# Altium PCB inv3ph.PcbDoc
Units mm, origin at the board's own origin, x right, y up, seen from the top; angles counter-clockwise.
Board outline 168.8 x 128.6 mm, 2 copper layers (Top Layer, Bottom Layer); 93 components, 52 nets, 234 pads, 0 vias.
Unrouted connection lines stored in the file: 3.
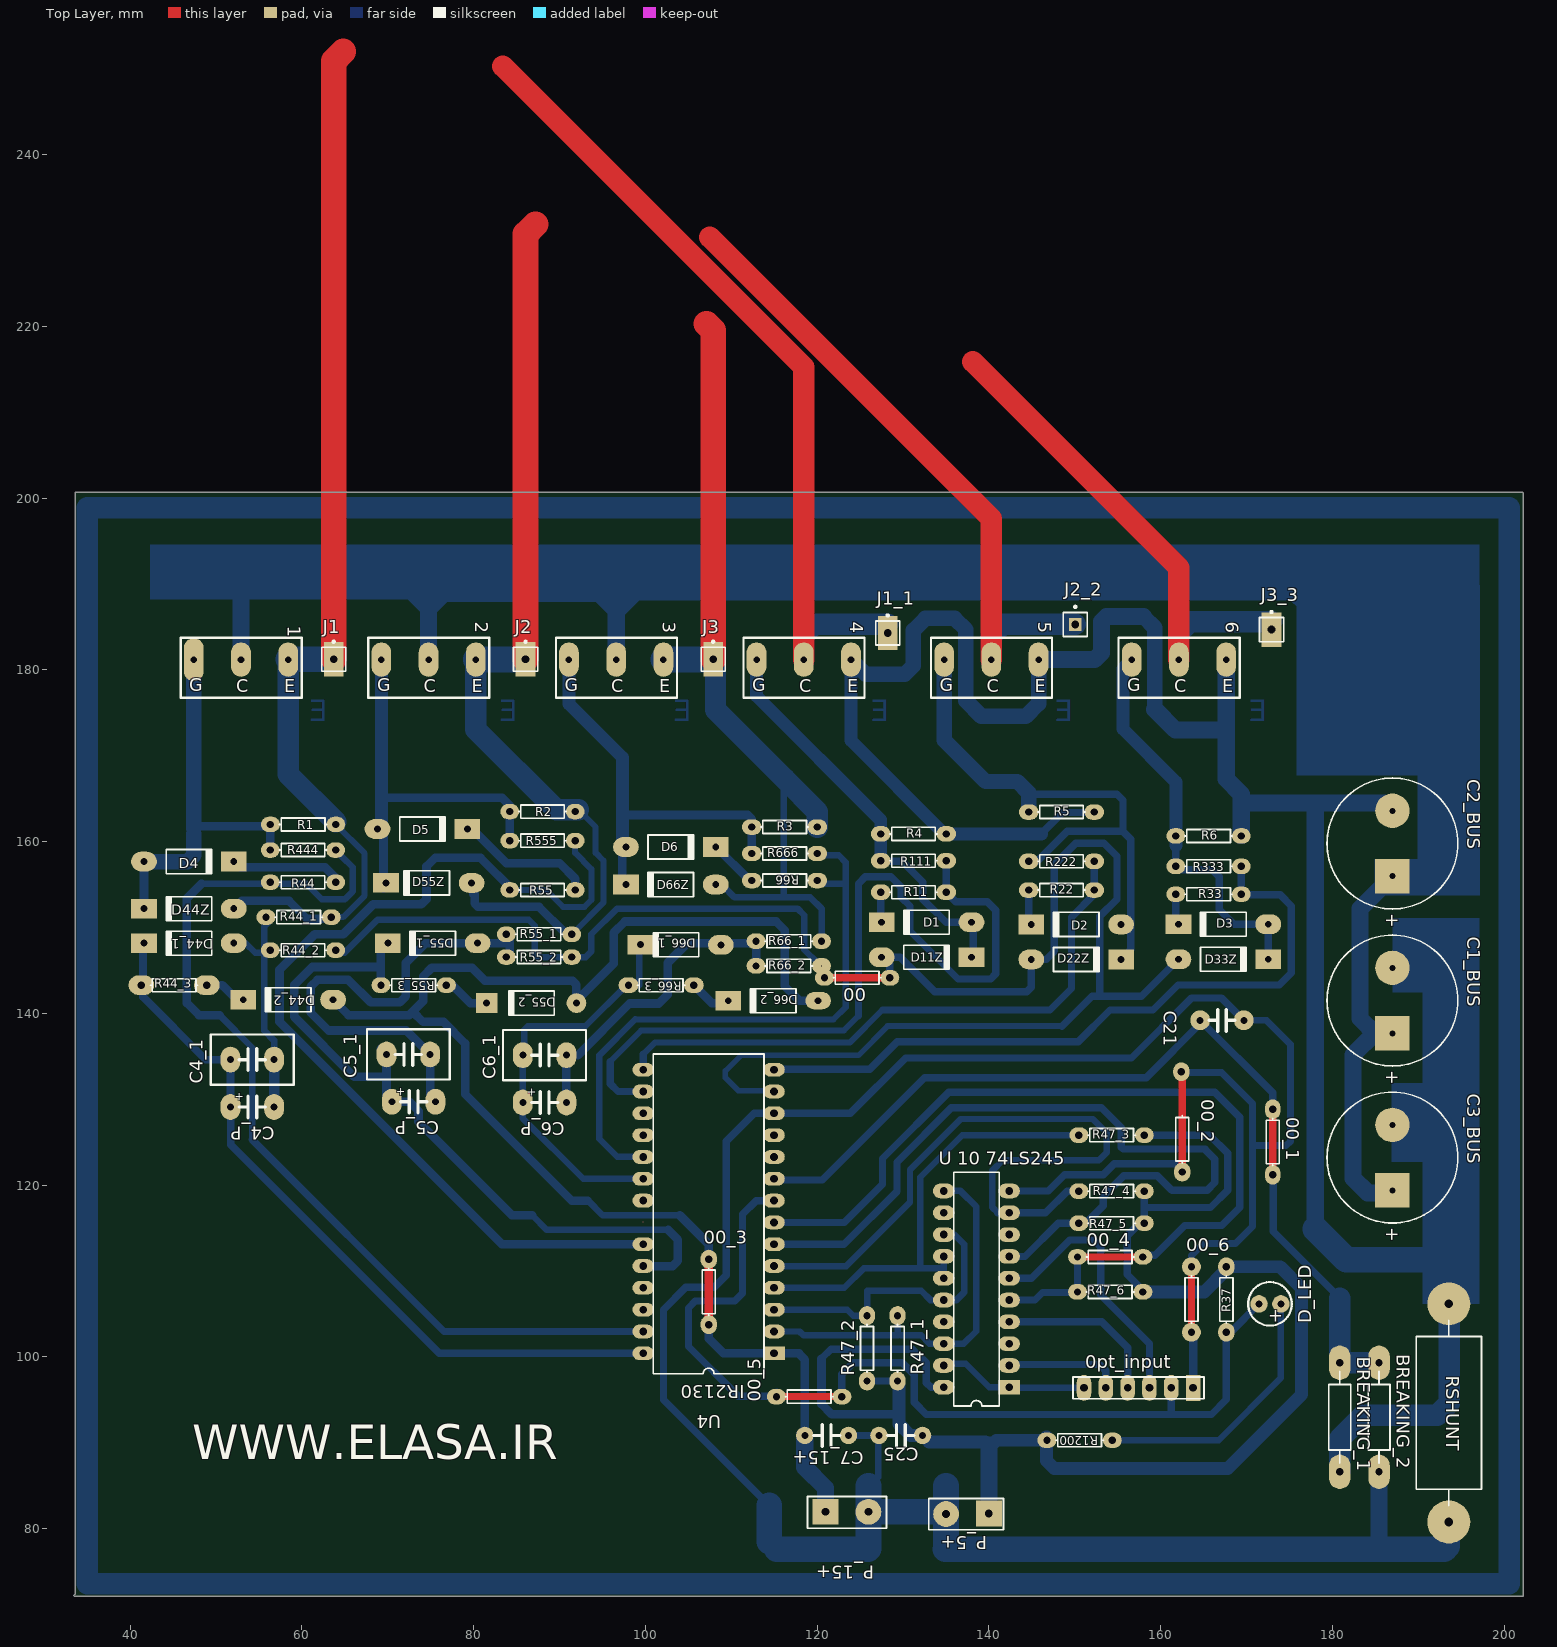
[diagram p0: Top Layer view]
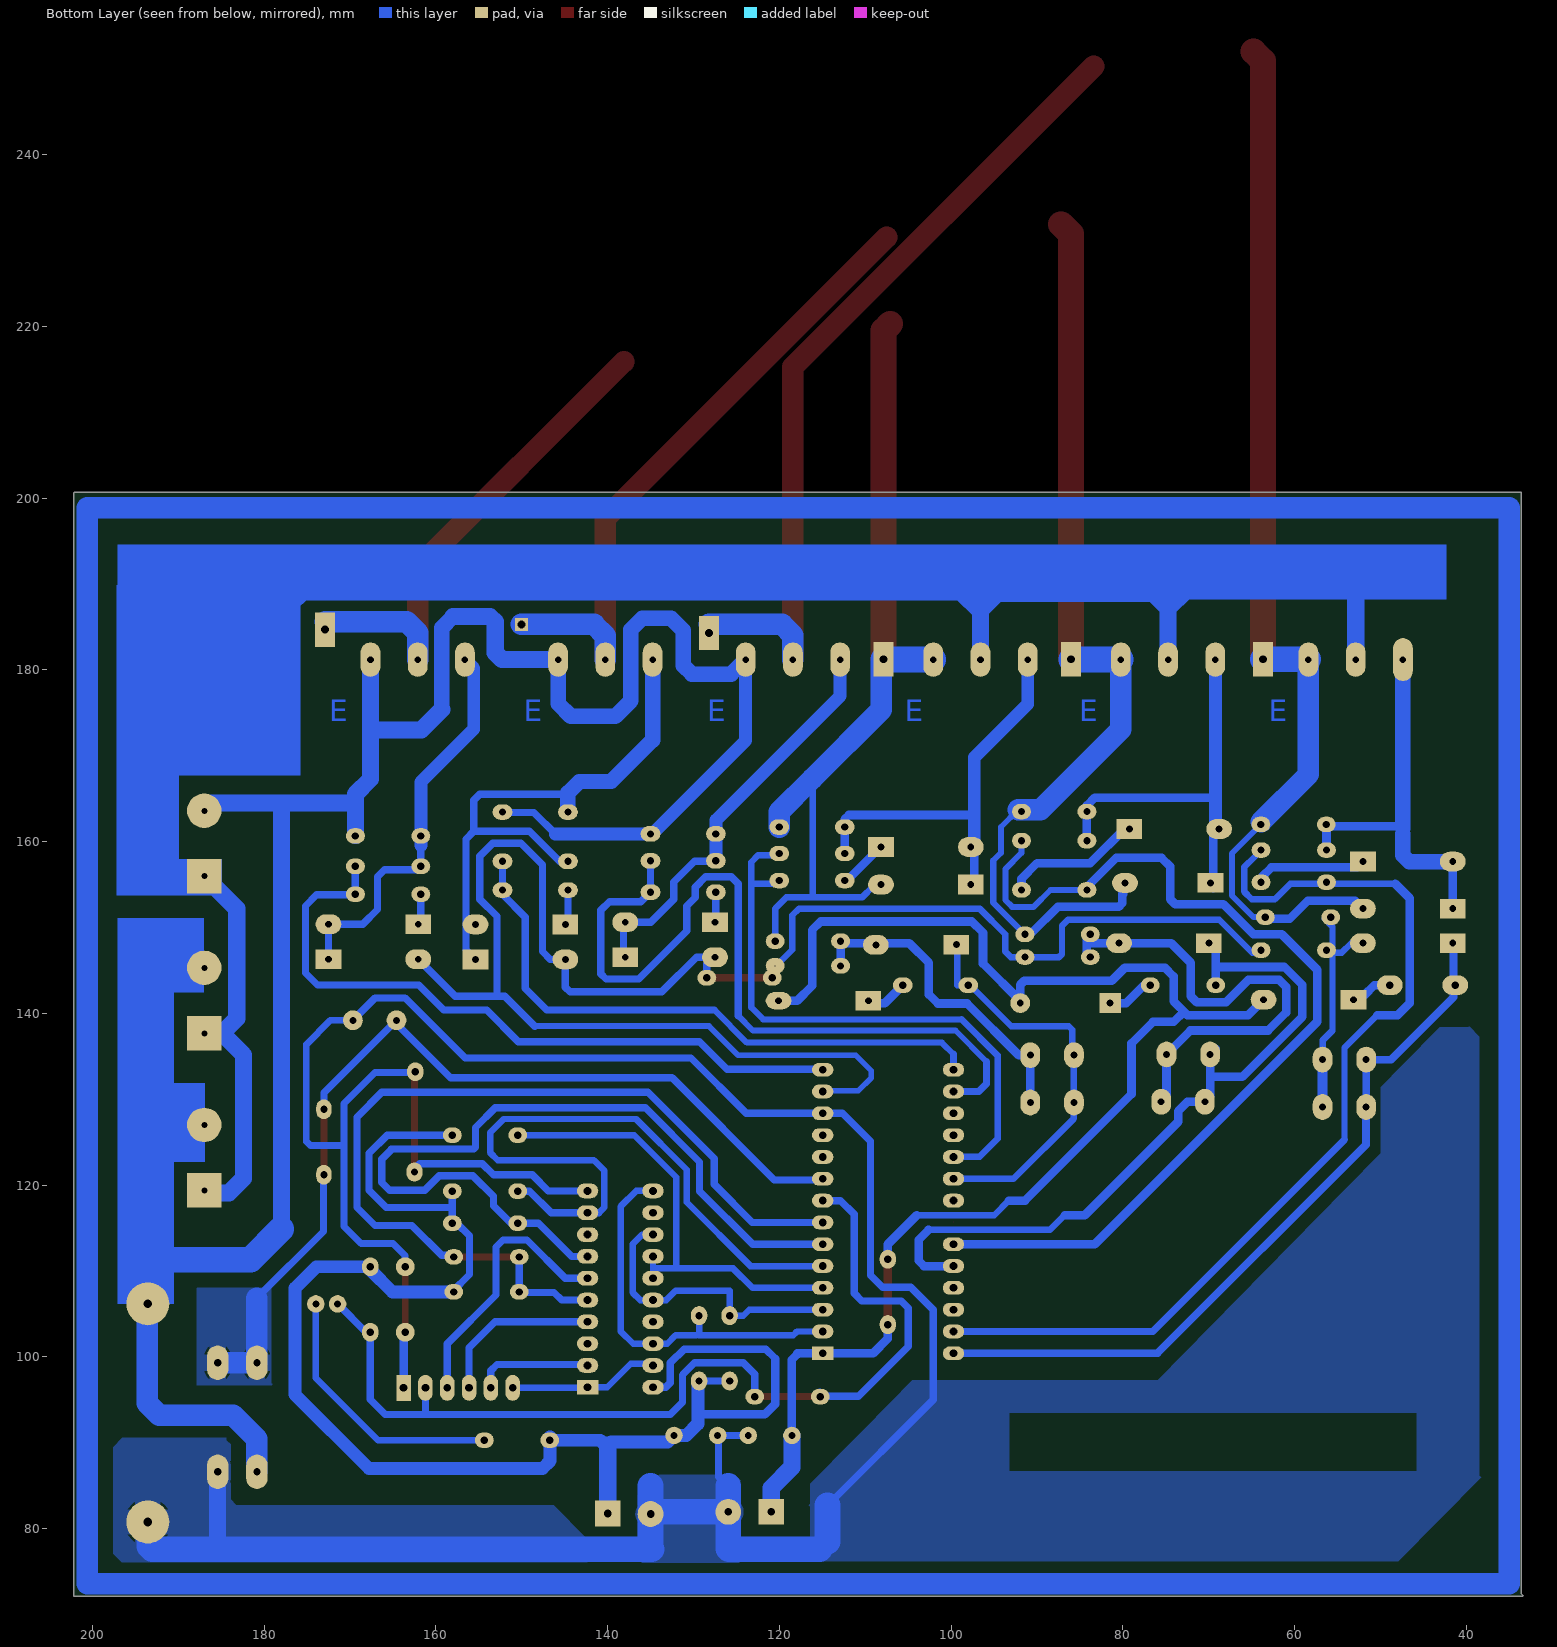
[diagram p1: Bottom Layer view, seen from below]

## Layer stack, top to bottom
Top Layer: signal copper 0.0356
Dielectric: dielectric 0.32, FR-4, Dk 4.8
Bottom Layer: signal copper 0.0356

## Board outline
202.1,200.7 202.2,200.6 202.2,72.1 33.5,72.1 33.4,72.2 33.6,72.4 33.6,200.7 202.1,200.7

## Design rules (kind name [scope] priority, off if disabled: settings)
Clearance [All] p1: gap=0.254
PlaneConnect [All] p1: planeconnectstyle=Relief reliefexpansion=2 reliefentries=4 reliefconductorwidth=2 reliefairgap=0
PolygonConnect [All] p1: connectstyle=Relief reliefconductorwidth=3 reliefentries=4 polygonreliefangle="90 Angle"
RoomDefinition inv_sh_shoheil_74ls245 [InComponentClass('inv_sh_shoheil_74ls245')] p1: confinementstyle=ConfineIn formatcopy=TRUE lockcomponents=FALSE outline 207.6,116.7 217.3,116.7 217.3,120.1 207.6,120.1
RoutingLayers [All] p1: top layer_v5=FALSE bottom layer_v5=TRUE
RoutingVias [All] p1: holewidth=0.711 width=1.27 viastyle="Through Hole" minholewidth=0.711 minwidth=1.27 maxholewidth=0.711 maxwidth=1.27
SilkscreenOverComponentPads [All] p1: minsilkscreentomaskgap=0.254
SolderMaskExpansion [All] p1: expansion=0.102
Width [All] p1: maxlimit=3.5 minlimit=0.5 preferedwidth=0.6
25 further rules are at their usual default settings.

## Components (designator, comment, footprint, x,y, rotation, side; value= is the part's Value field where it differs from the comment)
00 "Res1" AXIAL-0.3#1 124.648,144.14 r180 top
00_1 "Res1" AXIAL-0.3#2 173.044,125.012 r90 top
00_2 "Res1" AXIAL-0.3#3 162.5,125.344 r90 top
00_3 "Res1" AXIAL-0.3#4 107.376,107.564 r90 top
00_4 "Res1" AXIAL-0.3#1 154.112,111.636 r180 top
00_5 "Res1" AXIAL-0.3#1 119.06,95.372 r180 top
00_6 "Res1" AXIAL-0.3#5 163.576,106.68 r90 top
0pt_input "Header 6" HDR1X6 163.764,96.388 r180 top
1 "igbt_20n50" 20N50_S#1 39.019,180.812 r0 top
2 "igbt_20n50" 20N50_S#2 60.863,180.812 r0 top
3 "igbt_20n50" 20N50_S#2 82.707,180.812 r0 top
4 "igbt_20n50" 20N50_S#2 104.551,180.812 r0 top
5 "igbt_20n50" 20N50_S#2 126.395,180.812 r0 top
6 "igbt_20n50" 20N50_S#2 148.239,180.812 r0 top
BREAKING_1 "Res1" AXIAL-0.5 180.848,92.964 r270 top
BREAKING_2 "Res1" AXIAL-0.5 185.42,92.964 r90 top
C1_BUS "Cap Pol1" RB7.6-15 186.978,141.493 r270 top
C2_BUS "Cap Pol1" RB7.6-15 186.978,159.781 r270 top
C3_BUS "Cap Pol1" RB7.6-15 186.978,123.205 r270 top
C4_1 "Cap" C2B 54.212,134.612 r180 top
C4_P "Cap Pol1" CE2 54.216,129.1 r0 top
C5_1 "Cap" C2B 72.388,135.22 r180 top
C5_P "Cap Pol1" CE2 73.004,129.708 r0 top
C6_1 "Cap" C2B 88.252,135.132 r180 top
C6_P "Cap Pol1" CE2 88.252,129.62 r0 top
C7_15+ "Cap" C2#1 121.092,90.848 r0 top
C21 "Cap" C2#2 167.132,139.192 r0 top
C25 "Cap" C2#1 129.728,90.848 r180 top
D1 "Diode 1N4007" DIO10.46-5.3x2.8#1 132.731,150.616 r180 top
D2 "Diode 1N4007" DIO10.46-5.3x2.8#1 150.159,150.36 r180 top
D3 "Diode 1N4007" DIO10.46-5.3x2.8#1 167.291,150.376 r180 top
D4 "Diode 1N4007" DIO10.46-5.3x2.8#1 46.831,157.672 r0 top
D5 "Diode 1N4007" DIO10.46-5.3x2.8#1 74.027,161.472 r0 top
D6 "Diode 1N4007" DIO10.46-5.3x2.8#1 102.947,159.372 r0 top
D11Z "Diode 1N4007" DIO10.46-5.3x2.8#1 132.731,146.536 r0 top
D22Z "Diode 1N4007" DIO10.46-5.3x2.8#1 150.159,146.28 r0 top
D33Z "Diode 1N4007" DIO10.46-5.3x2.8#1 167.291,146.296 r0 top
D44_1 "Diode 1N4007" DIO10.46-5.3x2.8#1 46.831,148.176 r180 top
D44_2 "Diode 1N4007" DIO10.46-5.3x2.8#1 58.396,141.592 r180 top
D44Z "Diode 1N4007" DIO10.46-5.3x2.8#1 46.831,152.192 r180 top
D55_1 "Diode 1N4007" DIO10.46-5.3x2.8#1 75.227,148.176 r180 top
D55_2 "Diode 1N4007" DIO10.46-5.3x2.8#2 86.727,141.192 r180 top
D55Z "Diode 1N4007" DIO10.46-5.3x2.8#3 74.527,155.192 r180 top
D66_1 "Diode 1N4007" DIO10.46-5.3x2.8#4 103.547,147.976 r180 top
D66_2 "Diode 1N4007" DIO10.46-5.3x2.8#5 114.876,141.472 r180 top
D66Z "Diode 1N4007" DIO10.46-5.3x2.8#1 102.947,154.992 r180 top
D_LED "LED0" CE5 172.72,106.172 r180 top
J1 "Socket" PIN1#1 63.688,181.224 r0 top
J1_1 "Socket" PIN1#1 128.204,184.288 r0 top
J2 "Socket" PIN1#1 86.04,181.224 r0 top
J2_2 "Socket" PIN1#2 150.048,185.288 r0 top
J3 "Socket" PIN1#1 107.884,181.224 r0 top
J3_3 "Socket" PIN1#1 172.908,184.688 r0 top
P_5+ "Header 2" HDR1X2#1 138.684,81.7 r180 top
P_15+ "Header 2" HDR1X2#2 122.936,79.756 r0 top
R1 "Res1" AXIAL-0.3#1 60.132,161.996 r180 top
R2 "Res1" AXIAL-0.3#1 88.007,163.496 r180 top
R3 "Res1" AXIAL-0.3#2 116.199,161.696 r180 top
R4 "Res1" AXIAL-0.3#2 131.211,160.896 r180 top
R5 "Res1" AXIAL-0.3#2 148.439,163.44 r180 top
R6 "Res1" AXIAL-0.3#1 165.571,160.656 r180 top
R11 "Res1" AXIAL-0.3#2 131.211,154.112 r0 top
R22 "Res1" AXIAL-0.3#2 148.439,154.356 r0 top
R33 "Res1" AXIAL-0.3#1 165.571,153.872 r0 top
R37 "Res1" AXIAL-0.3#4 167.64,106.68 r270 top
R44 "Res1" AXIAL-0.3#1 60.111,155.268 r180 top
R44_1 "Res1" AXIAL-0.3#1 59.611,151.204 r0 top
R44_2 "Res1" AXIAL-0.3#1 60.111,147.356 r180 top
R44_3 "Res1" AXIAL-0.3#6 45.111,143.284 r180 top
R47_1 "Res1" AXIAL-0.3#4 129.356,100.992 r90 top
R47_2 "Res1" AXIAL-0.3#4 125.8,100.992 r90 top
R47_3 "Res1" AXIAL-0.3#1 154.28,125.82 r180 top
R47_4 "Res1" AXIAL-0.3#1 154.28,119.3 r180 top
R47_5 "Res1" AXIAL-0.3#1 154.28,115.564 r180 top
R47_6 "Res1" AXIAL-0.3#1 154.112,107.564 r180 top
R55 "Res1" AXIAL-0.3#1 88.007,154.368 r180 top
R55_1 "Res1" AXIAL-0.3#1 87.607,149.204 r0 top
R55_2 "Res1" AXIAL-0.3#1 87.607,146.556 r180 top
R55_3 "Res1" AXIAL-0.3#1 73.007,143.284 r180 top
R66 "Res1" AXIAL-0.3#2 116.199,155.468 r0 top
R66_1 "Res1" AXIAL-0.3#1 116.691,148.404 r0 top
R66_2 "Res1" AXIAL-0.3#7 116.691,145.526 r180 top
R66_3 "Res1" AXIAL-0.3#2 101.827,143.284 r180 top
R111 "Res1" AXIAL-0.3#2 131.211,157.76 r180 top
R222 "Res1" AXIAL-0.3#2 148.439,157.704 r180 top
R333 "Res1" AXIAL-0.3#1 165.571,157.12 r180 top
R444 "Res1" AXIAL-0.3#1 60.111,159.016 r180 top
R555 "Res1" AXIAL-0.3#1 88.007,160.116 r180 top
R666 "Res1" AXIAL-0.3#2 116.199,158.616 r180 top
R1200 "Res1" AXIAL-0.3#1 150.556,90.292 r0 top
RSHUNT "Res1" AXIAL-1.0 193.548,93.472 r90 top
U4 "IR21_30" IR2130 116.94,127.868 r180 top
"U 10 74LS245" "DM74LS245N" N20A 138.536,107.888 r90 top

## Footprints (in the part's own frame and the unit in brackets; to place one, negate y for a bottom-side part, rotate by r counter-clockwise, add the part's x,y. Pads: shape width x height; smd on the part's side, far side on the other; paste and mask are expansions set on the pad)
20N50_S#1 [mil]
  oval 90.55x196.85 hole 30: 1(330,15)
  oval 90.55x157.48 hole 30: 2(546.54,15) 3(763.07,15)
  silkscreen extent 270,-160 825,115
20N50_S#2 [mil]
  oval 90.55x157.48 hole 30: 1(330,15) 2(546.54,15) 3(763.07,15)
  silkscreen extent 270,-160 825,115
AXIAL-0.3#1 [mm] "Axial Device, Thru-Hole; 2 Leads; 0.3 in Pin Spacing"
  oval 2.2x1.8 hole 0.85: 1(-3.81,0) 2(3.81,0)
  silkscreen extent -2.77,-0.76 2.77,0.76
AXIAL-0.3#2 [mm] "Axial Device, Thru-Hole; 2 Leads; 0.3 in Pin Spacing"
  oval 2.3x1.8 hole 0.85: 1(-3.81,0) 2(3.81,0)
  silkscreen extent -2.77,-0.76 2.77,0.76
AXIAL-0.3#3 [mm] "Axial Device, Thru-Hole; 2 Leads; 0.3 in Pin Spacing"
  oval 2.2x1.9 hole 0.85: 1(-3.81,0) 2(7.856,0.1)
  silkscreen extent -2.77,-0.76 2.77,0.76
AXIAL-0.3#4 [mm] "Axial Device, Thru-Hole; 2 Leads; 0.3 in Pin Spacing"
  oval 2.2x1.9 hole 0.85: 1(-3.81,0) 2(3.81,0)
  silkscreen extent -2.77,-0.76 2.77,0.76
AXIAL-0.3#5 [mm] "Axial Device, Thru-Hole; 2 Leads; 0.3 in Pin Spacing"
  round 2.2 hole 0.85: 1(-3.81,0) 2(3.81,0)
  silkscreen extent -2.77,-0.76 2.77,0.76
AXIAL-0.3#6 [mm] "Axial Device, Thru-Hole; 2 Leads; 0.3 in Pin Spacing"
  oval 3x2.3 hole 0.85: 1(-3.81,0) 2(3.81,0)
  silkscreen extent -2.77,-0.76 2.77,0.76
AXIAL-0.3#7 [mm] "Axial Device, Thru-Hole; 2 Leads; 0.3 in Pin Spacing"
  oval 2.2x1.8 hole 0.1: 1(-3.81,0)
  oval 2.2x1.8 hole 0.85: 2(3.81,0)
  silkscreen extent -2.77,-0.76 2.77,0.76
AXIAL-0.5 [mm] "Axial Device, Thru-Hole; 2 Leads; 0.5 in Pin Spacing"
  oval 4x2.5 hole 0.85: 1(-6.35,0) 2(6.35,0)
  silkscreen extent -5.33,-1.27 5.33,1.27
AXIAL-1.0 [mm] "Axial Device, Thru-Hole; 2 Leads; 1.0 in Pin Spacing"
  round 5 hole 1: 1(-12.7,0) 2(12.7,0)
  silkscreen extent -10.79,-3.81 10.79,3.81
C2#1 [mil]
  round 80 hole 32: 1(-100,0) 2(100,0)
  silkscreen extent -60,-50 60,50
C2#2 [mil]
  round 90.55 hole 32: 1(-100,0) 2(100,0)
  silkscreen extent -60,-50 60,50
C2B [mm]
  oval 2.3x3 hole 0.813: 1(-2.54,0) 2(2.54,0)
  silkscreen extent -4.83,-2.92 4.83,2.92
CE2 [mm]
  oval 2.3x3 hole 0.813: 1(-2.54,0) 2(2.54,0)
  silkscreen extent -1.52,-1.27 1.52,1.27
CE5 [mil]
  round 80 hole 32: 1(-50,0) 2(50,0)
  silkscreen extent -100,-100 100,100
DIO10.46-5.3x2.8#1 [mm] "Diode, Axial; Body 5.2 x 2.7 mm (LxDia. max), Lead Dia. 0.86 mm (max)"
  oval 3x2.3 hole 0.8: 1(-5.23,0)
  rect 3x2.3 hole 0.8: 2(5.23,0)
  silkscreen extent -2.65,-1.41 2.75,1.4
DIO10.46-5.3x2.8#2 [mm] "Diode, Axial; Body 5.2 x 2.7 mm (LxDia. max), Lead Dia. 0.86 mm (max)"
  round 2.3 hole 0.8: 1(-5.23,0)
  rect 2.5x2.3 hole 0.8: 2(5.23,0)
  silkscreen extent -2.65,-1.4 2.75,1.4
DIO10.46-5.3x2.8#3 [mm] "Diode, Axial; Body 5.2 x 2.7 mm (LxDia. max), Lead Dia. 0.86 mm (max)"
  oval 3x2.3 hole 0.8: 1(-5.23,0)
  rect 3x2.3 hole 0.8: 2(4.727,-0.008)
  silkscreen extent -2.65,-1.41 2.75,1.4
DIO10.46-5.3x2.8#4 [mm] "Diode, Axial; Body 5.2 x 2.7 mm (LxDia. max), Lead Dia. 0.86 mm (max)"
  oval 3x2.3 hole 0.8: 1(-5.23,0)
  rect 3x2.3 hole 0.8: 2(4.147,-0.024)
  silkscreen extent -2.65,-1.4 2.75,1.4
DIO10.46-5.3x2.8#5 [mm] "Diode, Axial; Body 5.2 x 2.7 mm (LxDia. max), Lead Dia. 0.86 mm (max)"
  oval 3x2 hole 0.8: 1(-5.23,0)
  rect 3x2.3 hole 0.8: 2(5.23,0)
  silkscreen extent -2.65,-1.4 2.75,1.4
HDR1X2#1 [mm] "Connector; Header; 2 Position"
  rect 3x3 hole 0.9: 1(-1.304,-0.064)
  round 3 hole 0.9: 2(3.684,0)
  silkscreen extent -3.02,-1.8 5.68,1.82
HDR1X2#2 [mm] "Connector; Header; 2 Position"
  rect 3x3 hole 0.9: 1(-1.976,2.196)
  round 3 hole 0.9: 2(3.024,2.196)
  silkscreen extent -4.08,0.3 5.12,4
HDR1X6 [mm] "Connector; Header; 6 Position"
  rect 1.7x3 hole 0.9: 1(0,0)
  oval 1.7x3 hole 0.9: 2(2.54,0) 3(5.08,0) 4(7.62,0) 5(10.16,0) 6(12.7,0)
  silkscreen extent -1.27,-1.27 13.97,1.27
IR2130 [mm]
  rect 2.5x1.6 hole 0.9: 1(1.969,27.453)
  oval 2.5x1.6 hole 0.9: 2(1.969,24.913) 3(1.969,22.373) 4(1.969,19.833) 5(1.969,17.293) 6(1.969,14.753) 7(1.969,12.213) 8(1.969,9.673) 9(1.969,7.133) 10(1.969,4.593) 11(1.969,2.053) 12(1.969,-0.487) 13(1.969,-3.027) 14(1.969,-5.567) 15(17.209,-5.567) 16(17.209,-3.027) 17(17.209,-0.487) 18(17.209,2.053) 19(17.209,4.593) 20(17.209,7.133) 21(17.209,9.673) 23(17.209,14.753) 24(17.209,17.293) 25(17.209,19.833) 26(17.209,22.373) 27(17.209,24.913) 28(17.209,27.453)
  round 0.1 hole 0.1: 22(17.24,12.168)
  silkscreen extent 3.14,-7.4 16.04,29.82
N20A [mm] "DIP; 20 Leads; Row Spacing 7.62 mm; Pitch 2.54 mm"
  rect 1.7x2.5 hole 0.9: 1(-11.43,-3.81)
  oval 1.7x2.5 hole 0.9: 2(-8.89,-3.81) 3(-6.35,-3.81) 4(-3.81,-3.81) 5(-1.27,-3.81) 6(1.27,-3.81) 7(3.81,-3.81) 8(6.35,-3.81) 9(8.89,-3.81) 10(11.43,-3.81) 11(11.43,3.81) 12(8.89,3.81) 13(6.35,3.81) 14(3.81,3.81) 15(1.27,3.81) 16(-1.27,3.81) 17(-3.81,3.81) 18(-6.35,3.81) 19(-8.89,3.81) 20(-11.43,3.81)
  silkscreen extent -13.6,-2.65 13.6,2.65
PIN1#1 [mm] "Connector; Plug"
  rect 2.3x4 hole 0.9: 1(0,0)
  silkscreen extent -1.4,-1.4 1.4,2.17
PIN1#2 [mm] "Connector; Plug"
  rect 1.5x1.5 hole 0.9: 1(0,0)
  silkscreen extent -1.4,-1.4 1.4,2.17
RB7.6-15 [mm] "Polarized Capacitor (Radial); 2 Leads"
  rect 4x4 hole 0.7: 1(3.81,0)
  round 4 hole 0.7: 2(-3.81,0)
  silkscreen extent -7.62,-7.62 7.62,7.62

## Part data
00 00_1 00_2 00_3 00_4 00_5 00_6 BREAKING_1 BREAKING_2 R1 R2 R3 R4 R5 R6 R11 R22 R33 R37 R44 R44_1 R44_2 R44_3 R47_1 R47_2 R47_3 R47_4 R47_5 R47_6 R55 R55_1 R55_2 R55_3 R66 R66_1 R66_2 R66_3 R111 R222 R333 R444 R555 R666 R1200 RSHUNT: "Resistor"
0pt_input: "Header, 6-Pin"
C1_BUS C2_BUS C3_BUS C4_P C5_P C6_P: "Polarized Capacitor (Radial)"
C4_1 C5_1 C6_1 C7_15+ C21 C25: "Capacitor"
D1 D2 D3 D4 D5 D6 D11Z D22Z D33Z D44_1 D44_2 D44Z D55_1 D55_2 D55Z D66_1 D66_2 D66Z: "1 Amp General Purpose Rectifier"
D_LED: "Typical INFRARED GaAs LED"
P_5+ P_15+: "Header, 2-Pin"
"U 10 74LS245": "3-State Octal Bus Transceiver"

## Nets (pads, with @x,y where several pads share a name; then routed paths per layer and width w, separated by ;. In a path a pad name is that pad's centre, name@x,y a point inside that pad or via, vN(x,y) a via of type N, cw(c..) or ccw(c..) an arc to the next point about the centre after c; other vN are vias at no path point)
BREAKING_1_1: 00_1.1 00_1.2 BREAKING_1.1 BREAKING_2.2 C21.1 U4.9 | length 108.8
  Top Layer w0.85: 00_1.1 00_1.2
  Bottom Layer w0.85: U4.9@114.7,120.6 120.6,120.6 132.5,132.5 158.3,132.5 C21.1@164.792,138.992 ; U4.9 U4.9@115.142,120.906 ; C21.1 C21.1@164.792,138.992 ; C21.1@164.9,139.1 C21.1@164.792,138.992 ; 00_1.2 173.044,130.74 C21.1@164.792,138.992 ; 00_1.1@173.1,120.7 173.1,114.6 180.848,106.852
  Bottom Layer w2.5: 180.848,106.852 BREAKING_1.1 BREAKING_2.2
BU: 1.1 D4.1 D44Z.2 R1.2 R444.2 | length 45
  Bottom Layer w1: D44Z.2 D4.1 ; 48.003,161.8 R1.2@56.3,161.8 ; R444.2@56.301,158.9 R1.2@56.301,161.8
  Bottom Layer w1.8: D4.1 46.672,157.672 47.4,158.4 47.4,160.9 ; 47.401,161.503 1.1
BV: 2.1 D5.1 D55Z.2 R2.2 R555.2 | length 45.9
  Bottom Layer w0.75: D5.1 D5.1@69.245,161.92
  Bottom Layer w1: D55Z.2@69.497,154.592 D5.1@69.497,161.472 ; 69.497,165.1 83.3,165.1 84.197,164.203 R555.2
  Bottom Layer w1.5: D5.1@69.245,161.92 2.1
BW: 3.1 D6.1 D66Z.2 R3.2 R666.2 | length 51.3
  Bottom Layer w1: D66Z.2@97.317,154.992 97.317,163 97.417,163.1 111.9,163.1 112.389,162.611 R666.2@112.389,158.416
  Bottom Layer w1.5: 3.1 91.089,176.011 97.317,169.783 D6.1@97.317,160
BX: 4.1 D1.1 D11Z.2 R4.2 R111.2 | length 48.4
  Bottom Layer w0.85: R111.2@127.401,157.699 129.901,157.699 132.3,155.3 132.3,153.3 134.984,150.616 138.161,150.616 D11Z.2@138.161,146.536
  Bottom Layer w1.5: 4.1 112.933,176.967 127.401,162.499 R111.2@127.401,157.699
BY: 5.1 D2.1 D22Z.2 R5.2 R222.2 | length 67
  Bottom Layer w0.85: R222.2 145.604,157.704 149.1,161.2 155.6,161.2 155.6,164.8 154.9,165.5 144.629,165.5 ; D22Z.2 156.5,147.391 156.5,160.289 155.589,161.2
  Bottom Layer w1.8: 5.1 134.777,171.823 139.6,167 143.3,167 144.629,165.671 R5.2
BZ: 6.1 D3.1 D33Z.2 R6.2 R333.2 | length 47.1
  Bottom Layer w0.85: 161.761,159.556 161.761,156.72 165.98,156.72 166.8,155.9 166.8,152.1 168.524,150.376 D3.1 D33Z.2
  Bottom Layer w1.5: 6.1 155.6,180.172 155.6,173.1 161.761,166.939 161.761,159.556
"E MOTOR": 0pt_input.6 "U 10 74LS245.1" "U 10 74LS245.19" | length 17.6
  Bottom Layer w0.75: 134.726,98.998 134.928,99.2 137.3,99.2 140.042,96.458 142.346,96.458 142.416,96.388 0pt_input.6
EU: 1.3 4.2 D44Z.1 J1.1 J1_1.1 R1.1 R44_1.2 | length 222.9
  Top Layer w2.5: 83.4,250.3 118.433,215.267 4.2
  Top Layer w3: J1.1 63.688,250.888 64.8,252
  Bottom Layer w0.7: R44_1.2 64.804,151.204 67.3,153.7 67.3,158.638 R1.1
  Bottom Layer w1: D44Z.1 52.969,153.1 58.5,153.1 60.6,151 R44_1.2@63.921,151 ; 1.3 1.3@58.432,181.224
  Bottom Layer w2.5: 1.3 58.928,181.193 58.4,180.665 58.4,167.821 R1.1@63.921,162.3 ; 4.2 118.433,184.033 119.688,185.288 J1_1.1@128.204,185.288
  Bottom Layer w3: 1.3@58.432,181.224 J1.1
EV: 2.3 5.2 D55Z.1 J2.1 J2_2.1 R2.1 R55_1.2 | length 188.5
  Top Layer w2.5: 107.5,230.4 140.277,197.623 5.2
  Top Layer w3: J2.1 86.04,230.74 87.2,231.9
  Bottom Layer w0.7: R55_1.2@91.613,149.4 95.104,152.891 95.104,157.796 94.2,158.7 94.2,161.7 R2.1@92.2,163.7
  Bottom Layer w1: 79.957,153.9 80.1,153.9 80.1,152.8 80.5,152.4 87.6,152.4 90.6,149.4 R55_1.2@91.613,149.4 ; R55_1.2 R55_1.2@91.613,149.4 ; R55_1.2@91.817,149.204 91.621,149.4 R55_1.2@91.613,149.4
  Bottom Layer w1.8: J2.1@86.009,181.193 J2.1
  Bottom Layer w2.5: 2.3 80.245,173.055 89.6,163.7 R2.1@92.2,163.7 ; 5.2 140.277,183.977 141.588,185.288 J2_2.1
  Bottom Layer w3: 2.3 J2.1@86.009,181.193
EW: 3.3 6.2 D66Z.1 J3.1 J3_3.1 R3.1 R66_1.2 | length 160.7
  Top Layer w2.5: 138.1,215.9 162.121,191.879 6.2
  Top Layer w3: 107.1,220.3 107.884,219.516 J3.1
  Bottom Layer w0.75: D66Z.1@107.777,154.8 109.078,154.8 110.378,153.5 116.1,153.5 ; 116.2,167.3 116.1,167.2 116.1,153.5 ; R66_1.2@120.501,148.904 120.501,152.199 119.2,153.5 116.1,153.5
  Bottom Layer w2.5: 3.3 3.3@102.307,181.193 ; J3.1 108.154,180.954 108.154,175.346 116.2,167.3 120.009,163.491 R3.1 ; 6.2@162.121,181.879 6.2 162.121,184.321 163.4,185.6 J3_3.1@172.9,185.6
  Bottom Layer w3: 3.3 107.853,181.193 J3.1
FAULT_1: 00_5.1 00_5.2 0pt_input.2 D_LED.2 R37.2 U4.8 | length 114.6
  Top Layer w0.85: 00_5.2@115.25,95.38 00_5.1@122.87,95.38
  Bottom Layer w0.85: U4.8 112.895,118.195 111.3,116.6 111.3,107.4 110.4,106.5 105.8,106.5 105,105.7 105,101.2 110.8,95.4 114.8,95.4 00_5.2@115.3,95.9 ; 00_5.1@122.87,95.88 122.87,97.97 124.2,99.3 129.9,99.3 131.3,97.9 131.3,94.7 132.7,93.3 161.1,93.3 ; 0pt_input.2@161.224,96.024 0pt_input.2 161.224,93.424 161.1,93.3 ; D_LED.2 168.148,102.87 R37.2 167.64,95.04 165.9,93.3 161.1,93.3
GND_P: 00_2.1 00_2.2 00_6.1 00_6.2 0pt_input.1 "U 10 74LS245.10" BREAKING_2.1 C7_15+.2 C21.2 C25.2 P_5+.2 P_15+.2 RSHUNT.1 U4.12 | length 341.2
  Top Layer w0.8: 00_6.1 00_6.2
  Top Layer w0.85: 00_2.1 00_2.2@162.5,132.3
  Bottom Layer w0.8: 127.1,86 127.1,90.76 C25.2 ; 00_2.2@162,133.1 167.1,133.1 170.7,129.5 170.7,124.6 ; 00_6.2@163.9,110.7 163.6,111 163.6,111.8 165,113.2 168.7,113.2 170.7,115.2 170.7,124.6 ; C21.2 172.308,139.192 175.1,136.4 175.1,125.1 174.6,124.6 170.7,124.6
  Bottom Layer w0.85: 114.4,82.7 102.1,95 102.1,105.5 104.7,108.1 108,108.1 109.4,109.5 109.4,125.1 112.655,128.355 U4.12 123.855,128.355 130.3,134.8 156.6,134.8 163.6,141.8 167.064,141.8 C21.2 ; C7_15+.2 C25.2 ; 142.346,119.318 146.918,119.318 148.8,121.2 153.3,121.2 154.6,122.5 161.9,122.5 00_2.1@162.5,121.9 ; 00_2.2@162,133.1 00_2.2@162.5,132.6
  Bottom Layer w1: 0pt_input.1 00_6.1@163.764,103.2
  Bottom Layer w2: 185.42,78.02 BREAKING_2.1
  Bottom Layer w3: 114.4,78.5 114.4,82.7 ; 115.3,77.6 122.2,77.6 ; 122.616,77.6 125.9,77.6 ; 125.96,77.66 P_15+.2 ; 125.96,85 P_15+.2 ; P_5+.2@134.748,81.952 P_15+.2 ; 134.9,77.6 193,77.6 193.376,77.976 RSHUNT.1@193.376,80.6 ; 135,77.7 P_5+.2 135,85
HO1: R44.2 R444.1 U4.27 | length 113.1
  Bottom Layer w0.75: 48.3,155.1 60.5,155.1 62.3,153.3 65,153.3 65.9,154.2 65.9,157 64.653,158.247 ; 50.4,139.8 54.2,136 54.2,125.3
  Bottom Layer w0.85: 54.2,125.3 76.545,102.955 U4.27
  Bottom Layer w1: 48.3,155.1 46.6,153.4 46.6,141.2 48,139.8 50.4,139.8
HO2: R55.2 R555.1 U4.23 | length 113.3
  Bottom Layer w0.7: R55.2@84.532,154.368 88.432,154.368 90.4,152.4 92.9,152.4 93.7,153.2 93.7,156.8 91.817,158.683 R555.1@91.817,159.9
  Bottom Layer w1: R55.2@84.532,154.368 80.8,158.1 75.5,158.1 74.5,157.1 74.5,153.3 73.9,152.7 68.3,152.7 64.8,149.2 61.5,149.2 57.38,145.08 57.38,139.02 83.285,113.115 U4.23
HO3: R66.2 R666.1 U4.19 | length 70.6
  Bottom Layer w0.7: 98.8,139.3 121.9,139.3 123.3,140.7
  Bottom Layer w0.75: 98.8,139.3 94.6,135.1 94.6,125.4 96.7,123.3 U4.19@100.4,123.3 ; R66.2@120.009,155.068 123.232,155.068 123.3,155 ; R666.1@120.609,158.4 122.5,158.4 123.3,157.6 123.3,155 ; 123.3,140.7 123.3,155
LO1: R11.2 R111.1 U4.16 | length 94.1
  Bottom Layer w0.7: 95.9,134.4 99.5,138 123.1,138 124.8,139.7
  Bottom Layer w0.85: 95.9,134.4 95.9,131.8 96.805,130.895 U4.16 ; 124.8,139.7 124.8,155.1 125.6,155.9 128.6,155.9 129.8,154.7 129.8,153.5 130.8,152.5 130.8,149.6 136.4,144 140.2,144 140.799,144.599 140.799,145.219 140.8,145.22 140.8,152 139.8,153 136.133,153 R11.2 R111.1@135.021,156.96
LO2: R22.2 R222.1 U4.15 | length 70.7
  Bottom Layer w0.7: 99.731,135.231 101.1,136.6 123.8,136.6 127.6,140.4
  Bottom Layer w0.85: U4.15 99.731,135.231 ; 127.6,140.4 147.1,140.4 149.6,142.9 149.6,151.207 152.249,153.856 R222.1
LO3: R33.2 R333.1 U4.14 | length 82.2
  Bottom Layer w0.85: U4.14@114.971,133.5 126.1,133.5 129.3,136.7 150.4,136.7 154.1,140.4 159.1,140.4 162,143.3 173.8,143.3 175.2,144.7 175.2,152.5 173.9,153.8 169.562,153.8 169.381,153.619 R33.2 R333.1@169.381,156.72
Net1_2: 1.2 2.2 3.2 C1_BUS.1 C2_BUS.1 C3_BUS.1 | length 242.6
  Bottom Layer w2: 1.2 52.901,188.801 53.3,189.2 72.7,189.2 74.755,187.145 76.51,188.9 94.6,188.9 96.589,186.911 ; 2.2 74.745,187.145 ; 3.2 96.589,186.789 98.9,189.1 175.5,189.1 177,187.6 177,170.1 178.3,168.8 190.2,168.8 192.7,166.3 192.7,158.6 190.071,155.971 C2_BUS.1 183.2,152.193 183.2,139.4 184.917,137.683 ; C3_BUS.1 186.683,119.1 184.1,119.1 182.4,120.8 182.4,135.166 184.917,137.683 ; C1_BUS.1 184.917,137.683
NET4_3: 4.3 5.3 6.3 BREAKING_1.2 C1_BUS.2 C2_BUS.2 C3_BUS.2 R4.1 R5.1 R6.1 RSHUNT.2 | length 255.8
  Bottom Layer w0.85: R4.1 R4.1@135.025,160.9 ; 146.1,160.9 148.6,163.4 R5.1@152.249,163.4 ; RSHUNT.2@193.04,106.172 RSHUNT.2@193.6,105.612
  Bottom Layer w1.5: 4.3 123.933,171.767 134.804,160.896 R4.1 ; R4.1@135.025,160.9 146.1,160.9
  Bottom Layer w1.8: 4.3 125.626,179.5 130.2,179.5 131.2,180.5 131.2,184.6 132.6,186 136,186 137.3,184.7 137.3,176.4 139.1,174.6 144.3,174.6 145.777,176.077 5.3 ; 158,186.2 159.3,184.9 159.3,175.4
  Bottom Layer w2: 5.3 152.293,181.193 153.1,182 153.1,185.6 153.7,186.2 158,186.2 ; 159.3,175.4 161.7,173 167.621,173 ; 6.3 167.621,173 ; R6.1@169.381,160.7 169.381,164.5 ; 178,114.9 178,163.591 ; C2_BUS.2 186.069,164.5 169.381,164.5 ; 167.621,173 167.621,167.279 169.381,165.519 169.381,164.5
  Bottom Layer w2.5: BREAKING_1.2 180.848,90.448 183.6,93.2 192.2,93.2 193.6,94.6 RSHUNT.2@193.6,105.612
  Bottom Layer w3: 178,114.9 181.6,111.3 191,111.3
NetC4_1_1: C4_1.1 C4_P.2 D44_1.1 R44_1.1 R44_2.2 | length 27.3
  Bottom Layer w0.75: D44_1.1 53.424,148.176 54.544,147.056 R44_2.2@55.6,147.056 ; R44_1.1@56.5,151 55.6,150.1 R44_2.2@55.6,147.056 ; C4_1.1 56.752,136.848 55.6,138 R44_2.2@55.6,147.056
  Bottom Layer w1.2: C4_1.1@56.356,135.008 56.756,134.608 C4_P.2
NetC5_1_1: C5_1.1 C5_P.2 D55_1.1 R55_1.1 R55_2.2 | length 57.1
  Bottom Layer w1: C5_P.2 74.928,130.324 C5_1.1 72.148,138 63.1,138 61,140.1 61,143.1 61.8,143.9 65.4,143.9 68,141.3 71.4,141.3 72.1,142 72.1,145.9 74.376,148.176 84.173,148.176 84.197,148.2 ; R55_2.2@84.197,146.556 84.197,148.2 ; R55_1.1@84.197,149.204 84.197,148.2
NetC6_1_1: C6_1.1 C6_P.2 D66_1.1 R66_1.1 R66_2.2 | length 37.9
  Bottom Layer w1: C6_P.2 C6_1.1 92.132,135.132 98.15,141.15 101.55,141.15 102.6,142.2 102.6,145.9 104.876,148.176 112.857,148.176 R66_1.1@112.881,148.2 ; R66_2.2 R66_1.1@112.881,148.2 ; R66_1.1@112.881,148.204 R66_1.1@112.881,148.2
NetD1_2: D1.2 R11.1 | length 3.6
  Bottom Layer w0.85: R11.1 127.401,150.916 D1.2@127.701,150.616
NetD2_2: D2.2 R22.1 | length 4.1
  Bottom Layer w0.85: R22.1 144.629,150.66 D2.2
NetD3_2: D3.2 R33.1 | length 3.6
  Bottom Layer w0.85: R33.1 161.761,150.676 D3.2
NetD4_2: D4.2 R44.1 | length 13.4
  Bottom Layer w1: D4.2 52.733,157 62.7,157 63.8,155.9 R44.1@63.8,154.968
NetD5_2: D5.2 R55.1 | length 16.7
  Bottom Layer w1: D5.2@79.3,161 79.8,161.5 83.8,157.5 90,157.5 91.817,155.683 R55.1@91.817,154.068
NetD6_2: D6.2 R66.1 | length 6.2
  Bottom Layer w1: D6.2@107.777,159.372 108.228,159.372 112.132,155.468 R66.1
NetD44_2_2: D44_2.2 R44_3.1 | length 4.8
  Bottom Layer w1: R44_3.1 48.929,143.292 50.708,143.292 51.9,142.1 D44_2.2@53.2,142.1
NetD55_2_2: D55_2.2 R55_3.1 | length 5.6
  Bottom Layer w1: R55_3.1 76.825,143.292 77.508,143.292 79.608,141.192 D55_2.2
NetD66_2_2: D66_2.2 R66_3.1 | length 4.9
  Bottom Layer w1: R66_3.1 107.749,141.172 D66_2.2@109.646,141.172
NetD_LED_1: D_LED.1 R1200.2 | length 31.3
  Bottom Layer w0.75: R1200.2 166.746,90.292 173.99,97.536 D_LED.1
"U BOT": "U 10 74LS245.9" R47_4.2 U4.5 | length 80.9
  Bottom Layer w0.75: U4.5 123.375,110.575 130.8,118 130.8,121.8 136.7,127.7 152.1,127.7 153.7,126.1 153.7,123.8 152.8,122.9 141.6,122.9 140.4,121.7 140.4,117.4 141.022,116.778
  Bottom Layer w0.85: 141.022,116.778 146.578,116.778 149.1,119.3 R47_4.2
"U TOP": "U 10 74LS245.11" "U 10 74LS245.18" R47_1.2 U4.2 | length 45.5
  Bottom Layer w0.75: U4.2 117.945,102.955 118.4,102.5 129.1,102.5 ; 129.356,102.5 R47_1.2 ; 129.7,102.5 132.1,102.5 133.062,101.538 134.726,101.538 137.038,101.538 138.5,103 138.5,117.5 136.682,119.318 134.726,119.318
UH1: 0pt_input.5 "U 10 74LS245.2" | length 13.6
  Bottom Layer w0.85: 142.346,98.998 142.448,99.1 152.9,99.1 153.604,98.396 0pt_input.5
V5+: "U 10 74LS245.20" C25.1 P_5+.1 R37.1 R47_1.1 R47_2.1 R47_3.1 R47_4.1 R47_5.1 R47_6.1 R1200.1 | length 175.4
  Bottom Layer w0.85: 120.5,99.8 121.6,100.9 131.1,100.9 132.7,99.3 132.7,97 133.242,96.458 134.726,96.458 ; 126.9,97.182 129.018,97.182 R47_1.1@129.5,96.7 ; R47_6.1@158.09,107.6 156.1,109.59 156.1,114.1 157.564,115.564 R47_5.1 158.09,117.4 ; R47_4.1 158.09,117.4 ; R47_3.1 165.68,125.82 167.8,123.7 167.8,119.4 165.8,117.4 158.09,117.4 ; R37.1@167.64,110.14 R37.1
  Bottom Layer w1: 120.5,99.8 120.5,94.5 121.7,93.3 129.5,93.3
  Bottom Layer w1.5: R47_1.1@129.5,96.7 129.5,92.2 130.852,90.848 C25.1 133.012,90.104 139.596,90.104 139.944,89.756 139.988,89.712 ; 139.988,89.4 140.88,90.292 R1200.1 ; R1200.1@146.7,90.7 146.7,87.9 147.6,87 167.8,87 176.4,95.6 176.4,108 173.91,110.49 R37.1 ; R47_6.1 165.064,107.564 R37.1@167.64,110.14
  Bottom Layer w2: P_5+.1 139.988,89.712
V15+: 00_3.1 00_3.2 C7_15+.1 D44_2.1 D55_2.1 D66_2.1 P_15+.1 U4.1 | length 169.1
  Top Layer w1: 00_3.1 00_3.2
  Bottom Layer w0.75: 93.3,118.2 95,116.5 104,116.5
  Bottom Layer w1: D44_2.1 65.418,139.8 72.5,139.8 74.1,141.4 74.1,144.3 75.1,145.3 79.8,145.3 81.3,143.8 91.5,143.8 91.957,143.343 D55_2.1 91.957,141.457 96.3,145.8 96.3,149.4 97.6,150.7 115.2,150.7 116.2,149.7 116.2,143.2 117.928,141.472 D66_2.1 ; 72.9,140.2 74.1,139 76.5,139 79,136.5 79,130.6 91.4,118.2 93.3,118.2 ; 104,116.5 107.376,113.124 00_3.2 ; 00_3.1 107.376,102.124 109.085,100.415 U4.1 117.9,100.415 117.9,100.334 118.552,99.682 C7_15+.1
  Bottom Layer w2: C7_15+.1 118.552,87.148 120.96,84.74 P_15+.1
"V BOT": "U 10 74LS245.7" R47_5.2 U4.6 | length 96
  Bottom Layer w0.85: U4.6 123.115,113.115 129.3,119.3 129.3,122.7 135.6,129 153.1,129 155.4,126.7 155.4,124.4 155.6,124.2 165.2,124.2 ; 142.346,111.698 144.198,111.698 148.064,115.564 151.264,115.564 153.3,117.6 153.3,118.7 155.7,121.1 159.6,121.1 161.3,119.4 165.4,119.4 166.3,120.3 166.3,123 165.2,124.1
"V TOP": "U 10 74LS245.13" "U 10 74LS245.16" R47_2.2 U4.3 | length 34.6
  Bottom Layer w0.75: U4.3 123.505,105.495 124.2,104.8 125.8,104.8 125.8,107.7 132.1,107.7 133.182,106.618 134.726,106.618 136.218,106.618 137.1,107.5 137.1,113.1 135.962,114.238 134.726,114.238
VB1: C4_1.2 C4_P.1 D44_1.2 R44_3.2 U4.28 | length 87.5
  Bottom Layer w0.9: D44_1.2@41.5,148 41.5,141.9 48.788,134.612 C4_1.2 C4_P.1@51.672,129.1 ; C4_P.1@51.276,129.1 51.7,128.676 51.7,124.7 75.985,100.415 U4.28
VB2: C5_1.2 C5_P.1 D55_1.2 R55_3.2 U4.24 | length 87.2
  Bottom Layer w0.75: 86.8,116.5 88.52,114.78 102.64,114.78
  Bottom Layer w1: C5_1.2@69.197,135.871 C5_1.2 69.848,132.6 ; R55_3.2 69.197,145.1 ; D55_1.2@69.197,147.876 69.197,145.1 ; 86.8,116.5 84.45,116.5 73.57,127.38 73.57,128.62 72.482,129.708 C5_P.1 69.848,130.324 69.848,132.6 ; U4.24 103.165,110.575 103.76,111.17 103.76,113.66 102.64,114.78 ; 69.197,145.1 68.897,145.4 61.2,145.4 59.1,143.3 59.1,139.6 66.1,132.6 69.848,132.6
VB3: C6_1.2 C6_P.1 D66_1.2 R66_3.2 U4.20 | length 48.1
  Bottom Layer w0.75: C6_1.2 C6_P.1 85.712,127.768 92.745,120.735 U4.20 ; C6_1.2@85.9,134.9 85.9,138.1 86.3,138.5 93,138.5 97.784,143.284 99.3,143.284 D66_1.2@99.3,148.3
VH1: 0pt_input.4 "U 10 74LS245.4" | length 19.7
  Bottom Layer w0.85: 142.346,104.078 153.122,104.078 156.144,101.056 0pt_input.4
VS0: 00.1 00.2 D11Z.1 D22Z.1 D33Z.1 R44_2.1 R55_2.1 R66_2.1 U4.13 | length 208.6
  Top Layer w0.85: 00.2 00.1
  Bottom Layer w0.65: U4.13@114.866,131 110.8,131 109.3,132.5 109.3,133.3 111.1,135.1 124.8,135.1 128.2,138.5
  Bottom Layer w0.7: 128.2,138.5 148.5,138.5
  Bottom Layer w0.75: R44_2.1@63.921,147.056 64.956,147.056 68.8,150.9 86.4,150.9 87.1,150.2 87.1,146.9 87.444,146.556 93.056,146.556 93.7,147.2 93.7,149.2 96.7,152.2 117.7,152.2 118.492,151.408 118.492,147.408 R66_2.1@120.023,145.877
  Bottom Layer w0.85: U4.13@114.866,131 U4.13 ; R66_2.1 120.838,145.189 00.2 ; 00.1 128.458,145.779 127.701,146.536 129.664,146.536 133.7,142.5 144.4,142.5 144.929,143.029 D22Z.1 146.68,146.28 147.6,147.2 147.6,157.3 150.1,159.8 153.4,159.8 154.9,158.3 154.9,153.3 152.9,151.3 152.9,142 ; 148.5,138.5 152,142 157.765,142 D33Z.1
VS1: U4.26
VS2: U4.22
VS3: U4.18
"W BOT": 00_4.1 00_4.2 "U 10 74LS245.5" R47_6.2 U4.7 | length 108.3
  Top Layer w0.85: 00_4.2 00_4.1
  Bottom Layer w0.85: U4.7 123.155,115.655 127.6,120.1 127.6,123.1 135.3,130.8 166.3,130.8 169.2,127.9 169.2,117.4 167.1,115.3 162.8,115.3 159.329,111.829 00_4.1@158.229,111.829 ; 142.346,106.618 145.36,106.618 146.242,107.5 R47_6.2@150.828,107.5 ; R47_6.2 00_4.2@150.302,112.136
"W TOP": "U 10 74LS245.14" "U 10 74LS245.15" R47_3.2 U4.4 | length 54.8
  Bottom Layer w0.5: U4.4 U4.4@116.135,108.035
  Bottom Layer w0.75: U4.4 123.135,108.035 125.4,110.3 134.726,110.3 134.726,109.158 ; 132,110.4 132,120.9 136.9,125.8 R47_3.2@150,125.8 ; 134.726,110.4 134.726,111.698
WH1: 0pt_input.3 "U 10 74LS245.6" | length 31.6
  Bottom Layer w0.85: 142.346,109.158 144.958,109.158 149.4,113.6 152.2,113.6 153,112.8 153,107.2 158.684,101.516 0pt_input.3
pads on no net: "U 10 74LS245.3" "U 10 74LS245.8" "U 10 74LS245.12" "U 10 74LS245.17" U4.10 U4.11 U4.17 U4.21 U4.25
copper on no net: | length 581.8
  Bottom Layer w2.5: 35,73.6 200.6,73.6 200.6,198.9 35,198.9 35,73.6

## Polygon pours and split planes (outlines as drawn)
GND_P on Bottom Layer "Keep-Out Layer-No Net" (solid, pour order 1003): 136.5,79 136.5,83.8 134.5,85.8 134,86.3 125.2,86.3 124.5,85.6 124.6,85.5 124.6,79 136.4,79 136.5,78.9
GND_P on Bottom Layer "Keep-Out Layer-No Net" (solid, pour order 1002): 193.4,76.1 196.6,76.1 197.6,77.1 197.6,84 197.6,89.5 196.6,90.5 196.5,90.6 184.4,90.6 184.4,90.3 183.9,89.8 183.9,83.4 183.3,82.8 183.2,82.7 178.3,82.7 146.3,82.7 142.5,78.9 142.4,78.8 142.4,76.1 193.4,76.1
BREAKING_1_1 on Bottom Layer "Keep-Out Layer-No Net" (solid, pour order 1001): 187.878,96.7 179.122,96.7 179,96.8 179.153,96.925 179.153,108.075 187.969,108.075 188,108.1 187.878,108 187.878,96.7
GND_P on Bottom Layer "Keep-Out Layer-No Net" (solid, pour order 1000): 136.5,79.3 124.9,79.3 124.6,79 124.7,78.9 124.7,76 136,76 136.1,76.1 137,77 137,77.3 136.5,77.8 136.5,79.3
GND_P on Bottom Layer "Keep-Out Layer-No Net" (solid, pour order 1000): 104.615,97.2 116.404,85.2 116.404,84.8 116.404,82.9 116.6,82.7 116.207,82.3 97.542,82.3 42.233,82.3 38.598,86 38.5,86.1 38.5,101.7 38.5,137.3 39.679,138.5 39.777,138.4 42.43,138.4 43.117,138.4 47.44,134 49.994,131.4 49.994,125.4 49.994,123.7 54.12,119.5 75.929,97.3 102.355,97.3 104.517,97.3 106.187,95.6
GND_P on Bottom Layer "Keep-Out Layer-No Net" (solid, pour order 1002): 116.4,85.161 116.4,76.698 115.909,76.2 112.962,76.2 47.927,76.2 38.3,85.957 38.496,86.156 38.496,86.7 40.015,85.161 116.4,85.161

## Other copper
Bottom Layer:
  rectangle net NET4_3: 187,142.4 197.1,151.1
  rectangle net NET4_3: 190.5,106.172 197.1,142.4
  rectangle net NET4_3: 186.9,122.7 197.1,131.9
  rectangle net Net1_2: 175.8,167.7 197.2,189.9
  rectangle net Net1_2: 189.9,153.7 197.2,167.7
  rectangle net Net1_2: 184.9,153.7 197.2,158
  rectangle net Net1_2: 42.3,188.2 197.1,194.6
  text "E" at 63,174 h2.5
  text "E" at 85.1,174 h2.5
  text "E" at 105.4,174 h2.5
  text "E" at 128.4,174 h2.5
  text "E" at 149.8,174 h2.5
  text "E" at 172.4,174 h2.5

## Silkscreen, mask and mechanical layers (free items; w line width, h text height)
Top Overlay:
  text "WWW.ELASA.IR" at 47.2,88.1 h4

## Text inside footprints (layer, text, board x,y; h text height)
1: Top Overlay "E" at 57.942,177.383 h1.5; Top Overlay "C" at 52.354,177.383 h1.5; Top Overlay "G" at 46.893,177.51 h1.5
2: Top Overlay "E" at 79.786,177.383 h1.5; Top Overlay "C" at 74.198,177.383 h1.5; Top Overlay "G" at 68.737,177.51 h1.5
3: Top Overlay "E" at 101.63,177.383 h1.5; Top Overlay "C" at 96.042,177.383 h1.5; Top Overlay "G" at 90.581,177.51 h1.5
4: Top Overlay "E" at 123.474,177.383 h1.5; Top Overlay "C" at 117.886,177.383 h1.5; Top Overlay "G" at 112.425,177.51 h1.5
5: Top Overlay "E" at 145.318,177.383 h1.5; Top Overlay "C" at 139.73,177.383 h1.5; Top Overlay "G" at 134.269,177.51 h1.5
6: Top Overlay "E" at 167.162,177.383 h1.5; Top Overlay "C" at 161.574,177.383 h1.5; Top Overlay "G" at 156.113,177.51 h1.5
C1_BUS: Top Overlay "+" at 186.241,133.361 h1.5 r270
C2_BUS: Top Overlay "+" at 186.241,151.649 h1.5 r270
C3_BUS: Top Overlay "+" at 186.241,115.073 h1.5 r270
C4_P: Top Overlay "+" at 52.184,129.862 h0.91
C5_P: Top Overlay "+" at 70.972,130.47 h0.91
C6_P: Top Overlay "+" at 86.22,130.382 h0.91
D_LED: Top Overlay "+" at 174.244,105.41 h1.52 r180
U4: Top Overlay "IR2130" at 111.54,96.668 h1.52 r180